# EAGLE board big_seven_v0.2 (EAGLE 6.5.0)
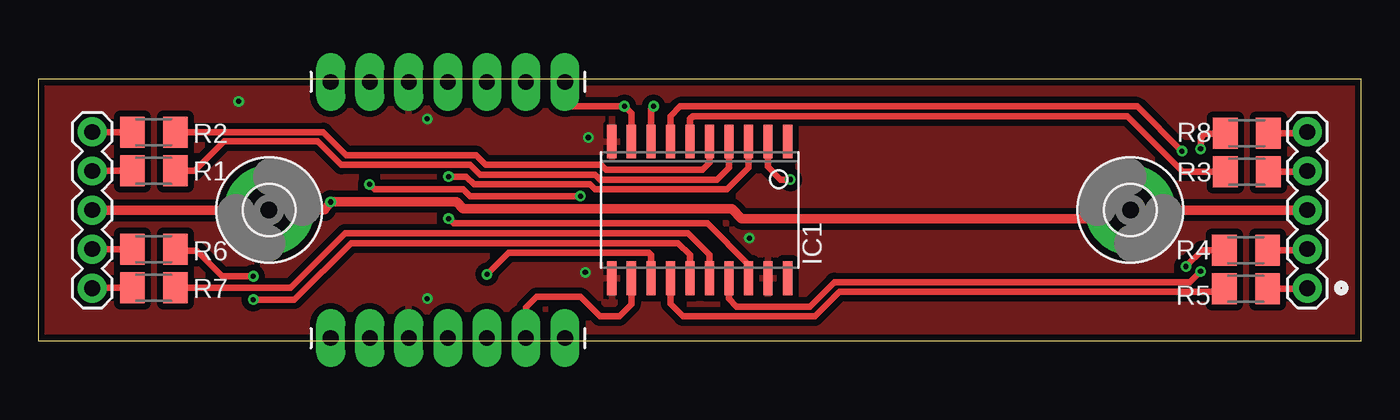
[diagram p0: board, top side]
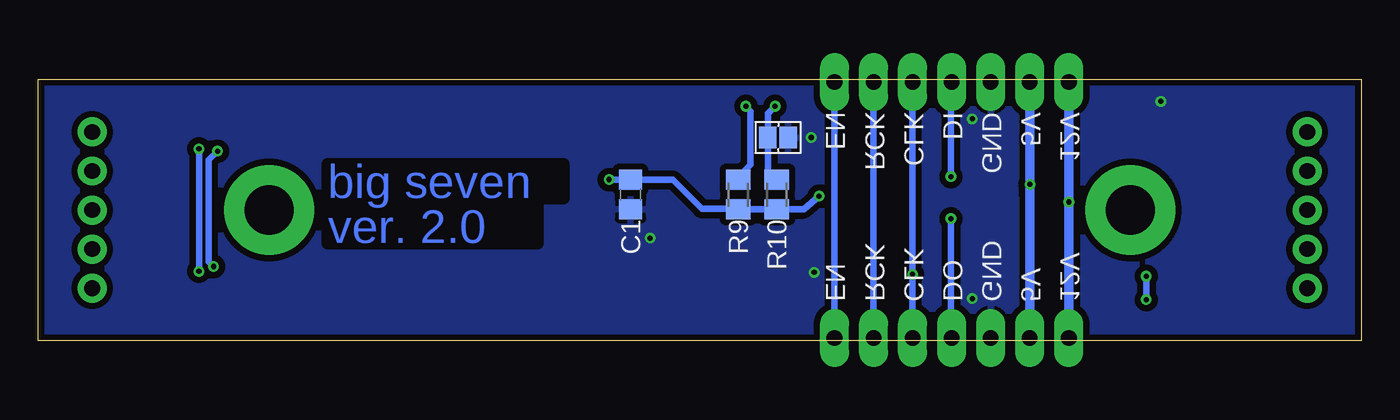
[diagram p1: board, bottom side, seen from below]

Size 86 x 17 mm. Coordinates in mm from the lower left corner, seen from the top.
Outline: 86,0 86,17 0,17 0,0 86,0
Copper layers (1*16): Top 0.0356mm / dielectric 1.5011mm / Bottom 0.0356mm
Design rules "LaenPCBOrder *": minimum track width 6mil, minimum drill 13mil, track to track 6mil, track to pad 6mil, pad to pad 6mil, via to via 6mil, smd to smd 6mil, copper to edge 15mil, drill to drill 6mil, minimum pad ring 7mil, minimum via ring 7mil, stop-mask expansion 3mil, vias tented up to drill 25mil, thermal gap 10mil

## Footprints (pad centres in the part's own frame; a part is rotated, then mirrored left to right if it is on the bottom)
C0805 = smd 1.3 x 1.5: 1 -0.95,0; 2 0.95,0
3,2-PAD = drill 3.2 pad 5.842: B3,2 0,0
SOIC-20 = smd 0.6 x 2.2: 1 -5.715,-4.445; 2 -4.445,-4.445; 3 -3.175,-4.445; 4 -1.905,-4.445; 5 -0.635,-4.445; 6 0.635,-4.445; 7 1.905,-4.445; 8 3.175,-4.445; 9 4.445,-4.445; 10 5.715,-4.445; 11 5.715,4.445; 12 4.445,4.445; 13 3.175,4.445; 14 1.905,4.445; 15 0.635,4.445; 16 -0.635,4.445; 17 -1.905,4.445; 18 -3.175,4.445; 19 -4.445,4.445; 20 -5.715,4.445
JUMPER_SOLDER_1X2 = smd 1.143 x 1.422: 1 -0.66,0; 2 0.66,0
1X05 = drill 1.016 pad 1.88: 1 0,0; 2 2.54,0; 3 5.08,0; 4 7.62,0; 5 10.16,0
1X07_LONGPADS = drill 1.016 pad 1.88 long: 1 0,0; 2 2.54,0; 3 5.08,0; 4 7.62,0; 5 10.16,0; 6 12.7,0; 7 15.24,0
M1206 = smd 1.6 x 2: 1 -1.4,0; 2 1.4,0
M0805 = smd 1.3 x 1.6: 1 -0.95,0; 2 0.95,0

## Placement (x,y rotation side)
C1  [C0805]  47.5,9.5 270 bottom
H1  MOUNT-PAD-ROUND3.2  [3,2-PAD]  15,8.5 0 top
H2  MOUNT-PAD-ROUND3.2  [3,2-PAD]  71,8.5 90 top
IC1  IC_TPIC6B595DW  [SOIC-20]  43,8.5 180 top
J1  JUMPER_SOLDER_1X2  [JUMPER_SOLDER_1X2]  37.91,13.21 180 bottom
JP1  [1X05]  82.5,3.41 90 top
JP2  [1X05]  3.5,3.41 90 top
JP3  [1X07_LONGPADS]  19,16.83 0 top
JP4  [1X07_LONGPADS]  19,0.17 0 top
R1  [M1206]  7.5,11.05 180 top
R2  [M1206]  7.5,13.56 180 top
R3  [M1206]  78.57,10.98 0 top
R4  [M1206]  78.51,5.89 0 top
R5  [M1206]  78.51,3.38 0 top
R6  [M1206]  7.5,5.95 180 top
R7  [M1206]  7.5,3.44 180 top
R8  [M1206]  78.57,13.49 0 top
R9  [M0805]  40.5,9.5 270 bottom
R10  [M0805]  38,9.5 270 bottom

## Library data of the parts
C1 R1-R10 = rcl
H1 H2 = holes
IC1 J1 = dp_devices
JP1-JP4 = SparkFun-Connectors

## Nets
+5V: C1.1 IC1.2 JP3.2 JP4.2 R9.2 R10.2
+12V: H1.B3,2 H2.B3,2 JP1.3 JP2.3 JP3.1 JP4.1
CLK: IC1.13 JP3.5 JP4.5
DI: IC1.3 JP3.4
DO: IC1.18 JP4.4
G: IC1.9 J1.2 JP3.7 JP4.7 R10.1
GND: C1.2 IC1.10 IC1.11 IC1.19 J1.1 JP3.3 JP4.3
N$1: IC1.4 R1.1
N$2: IC1.5 R2.1
N$4: IC1.6 R3.1
N$5: IC1.7 R4.1
N$6: IC1.14 R5.1
N$8: IC1.15 R6.1
N$9: IC1.16 R7.1
N$11: IC1.17 R8.1
N$13: IC1.8 R9.1
RCK: IC1.12 JP3.6 JP4.6
SEG_A: JP2.4 R1.2
SEG_B: JP2.5 R2.2
SEG_C: JP1.4 R3.2
SEG_D: JP1.2 R4.2
SEG_E: JP1.1 R5.2
SEG_F: JP2.2 R6.2
SEG_G: JP2.1 R7.2
SEG_H: JP1.5 R8.2

## Tracks (layer width: path | path; a pad name or v marks a point on that pad's centre or on a via)
+5V  (via drill 0.33)
  Top 0.406: v48.9,10.48 48.26,10.48 47.44,11.29 IC1.2 | v35.24,9.4 28.07,9.4 27.62,9.84 21.84,9.84 v21.53,10.16
  Bottom 0.406: v48.9,10.48 47.53,10.48 C1.1 44.74,10.45 42.86,8.57 40.52,8.57 R9.2 R10.2 36.22,8.55 v35.24,9.4 | v21.53,10.16 21.54,9.53
  Bottom 0.61: JP3.2 21.54,9.53 JP4.2
+12V  (via drill 0.33)
  Top 0.61: JP1.3 H2.B3,2 70.44,7.94 45.72,7.94 45.09,8.57 27.62,8.57 27.18,9.02 v19,9.02 18.61,8.5 H1.B3,2 JP2.3
  Bottom 0.61: JP3.1 v19,9.02 JP4.1
CLK  (via drill 0.33)
  Top 0.406: IC1.13 39.82,5.58 39.69,5.71 30.56,5.71 v29.16,4.32
  Bottom 0.406: JP4.5 v29.16,4.32 JP3.5
DI  (via drill 0.33)
  Top 0.406: IC1.3 46.17,11.25 44.77,9.84 36.2,9.84 35.88,10.16 28.32,10.16 27.81,10.67 v26.67,10.67
  Bottom 0.406: v26.67,10.67 26.67,16.78 JP3.4
DO  (via drill 0.33)
  Top 0.406: IC1.18 46.17,4.94 43.5,7.62 26.99,7.62 v26.67,7.94
  Bottom 0.406: v26.67,7.94 26.67,0.22 JP4.4
G  (via drill 0.33)
  Top 0.406: IC1.9 38.55,14.79 v38.1,15.24 34.61,15.24 34.24,15.61 JP3.7
  Bottom 0.406: 37.71,10.16 R10.1 38.57,11.02 J1.2 38.57,14.77 v38.1,15.24 38.42,14.92 | JP4.7 JP3.7
GND  (via drill 0.33)
  other vias: 35.56,4.45 25.27,2.73 25.27,14.41 35.75,13.21 46.23,6.67 13.02,15.56
  pour Top (isolate 0.406): 0,17 86,17 86,0 0,0
  pour Bottom (isolate 0.406): 86.04,17.14 0,17.14 0,-0.32 86.04,-0.32
N$1
  Top 0.406: IC1.4 44.9,11.25 44.13,10.48 36.51,10.48 36.2,10.79 28.7,10.79 28.07,11.43 19.68,11.43 18.16,12.95 12.06,12.95 10.16,11.05 R1.1
N$2
  Top 0.406: IC1.5 43.63,11.57 43.18,11.11 36.89,11.11 36.58,11.43 29.08,11.43 28.45,12.06 20,12.06 18.51,13.56 R2.1
N$4
  Top 0.406: IC1.6 42.36,14.42 42.55,14.61 70.8,14.61 74.42,10.98 R3.1
N$5  (via drill 0.33)
  Top 0.406: IC1.7 41.09,14.61 41.73,15.24 71.44,15.24 v74.36,12.32 | v74.61,4.83 75.67,5.89 R4.1
  Bottom 0.406: v74.36,12.32 74.93,11.75 74.93,5.14 v74.61,4.83
N$6
  Top 0.406: IC1.14 41.09,2.4 41.91,1.59 50.48,1.59 52.07,3.17 76.39,3.17 R5.1
N$8  (via drill 0.33)
  Top 0.406: IC1.15 42.36,5.58 41.59,6.35 20.32,6.35 16.64,2.67 v13.97,2.67 | v13.97,4.19 11.94,4.19 10.29,5.84 9.01,5.84 R6.1
  Bottom 0.406: v13.97,4.19 v13.97,2.67
N$9
  Top 0.406: 8.59,2.86 R7.1 8.91,3.43 16.38,3.43 19.94,6.99 42.23,6.99 43.63,5.58 IC1.16
N$11  (via drill 0.33)
  Top 0.406: IC1.17 44.9,2.72 45.4,2.22 50.16,2.22 51.75,3.81 74.87,3.81 v75.56,4.51 | v75.56,12.48 75.56,13.21 75.82,13.46 77.14,13.46 R8.1
  Bottom 0.406: v75.56,4.51 v75.56,12.48
N$13  (via drill 0.33)
  Top 0.406: IC1.8 39.82,15.06 v40.01,15.24
  Bottom 0.406: R9.1 40.5,10.62 39.69,11.43 39.69,14.92 v40.01,15.24
RCK
  Top 0.406: IC1.12 38.55,2.36 37.78,1.59 36.51,1.59 35.24,2.86 32.38,2.86 31.7,2.17 JP4.6
  Bottom 0.406: JP4.6 JP3.6
SEG_A
  Top 0.406: R1.2 3.51,11.05 JP2.4
SEG_B
  Top 0.406: R2.2 3.52,13.56 JP2.5
SEG_C
  Top 0.406: R3.2 82.45,10.98 JP1.4
SEG_D
  Top 0.406: R4.2 82.44,5.89 JP1.2
SEG_E
  Top 0.406: R5.2 82.47,3.38 JP1.1
SEG_F
  Top 0.406: R6.2 JP2.2
SEG_G
  Top 0.406: R7.2 3.53,3.44 JP2.1
SEG_H
  Top 0.406: R8.2 82.42,13.49 JP1.5

## Text on the board
Bottom: big seven | ver. 2.0
bPlace: 12V / 5V / GND / DI / CLK / RCK / EN | 12V / 5V / GND / DO / CLK / RCK / EN
bStop: big seven | ver. 2.0